# Altium PCB Copy of onboardpcb.PcbDoc
Units mil, origin at the board's own origin, x right, y up, seen from the top; angles counter-clockwise.
Board outline 6000 x 4000 mil, 2 copper layers (Top Layer, Bottom Layer); 11 components, 6 nets, 22 pads, 6 vias.
Unrouted connection lines stored in the file: 1.
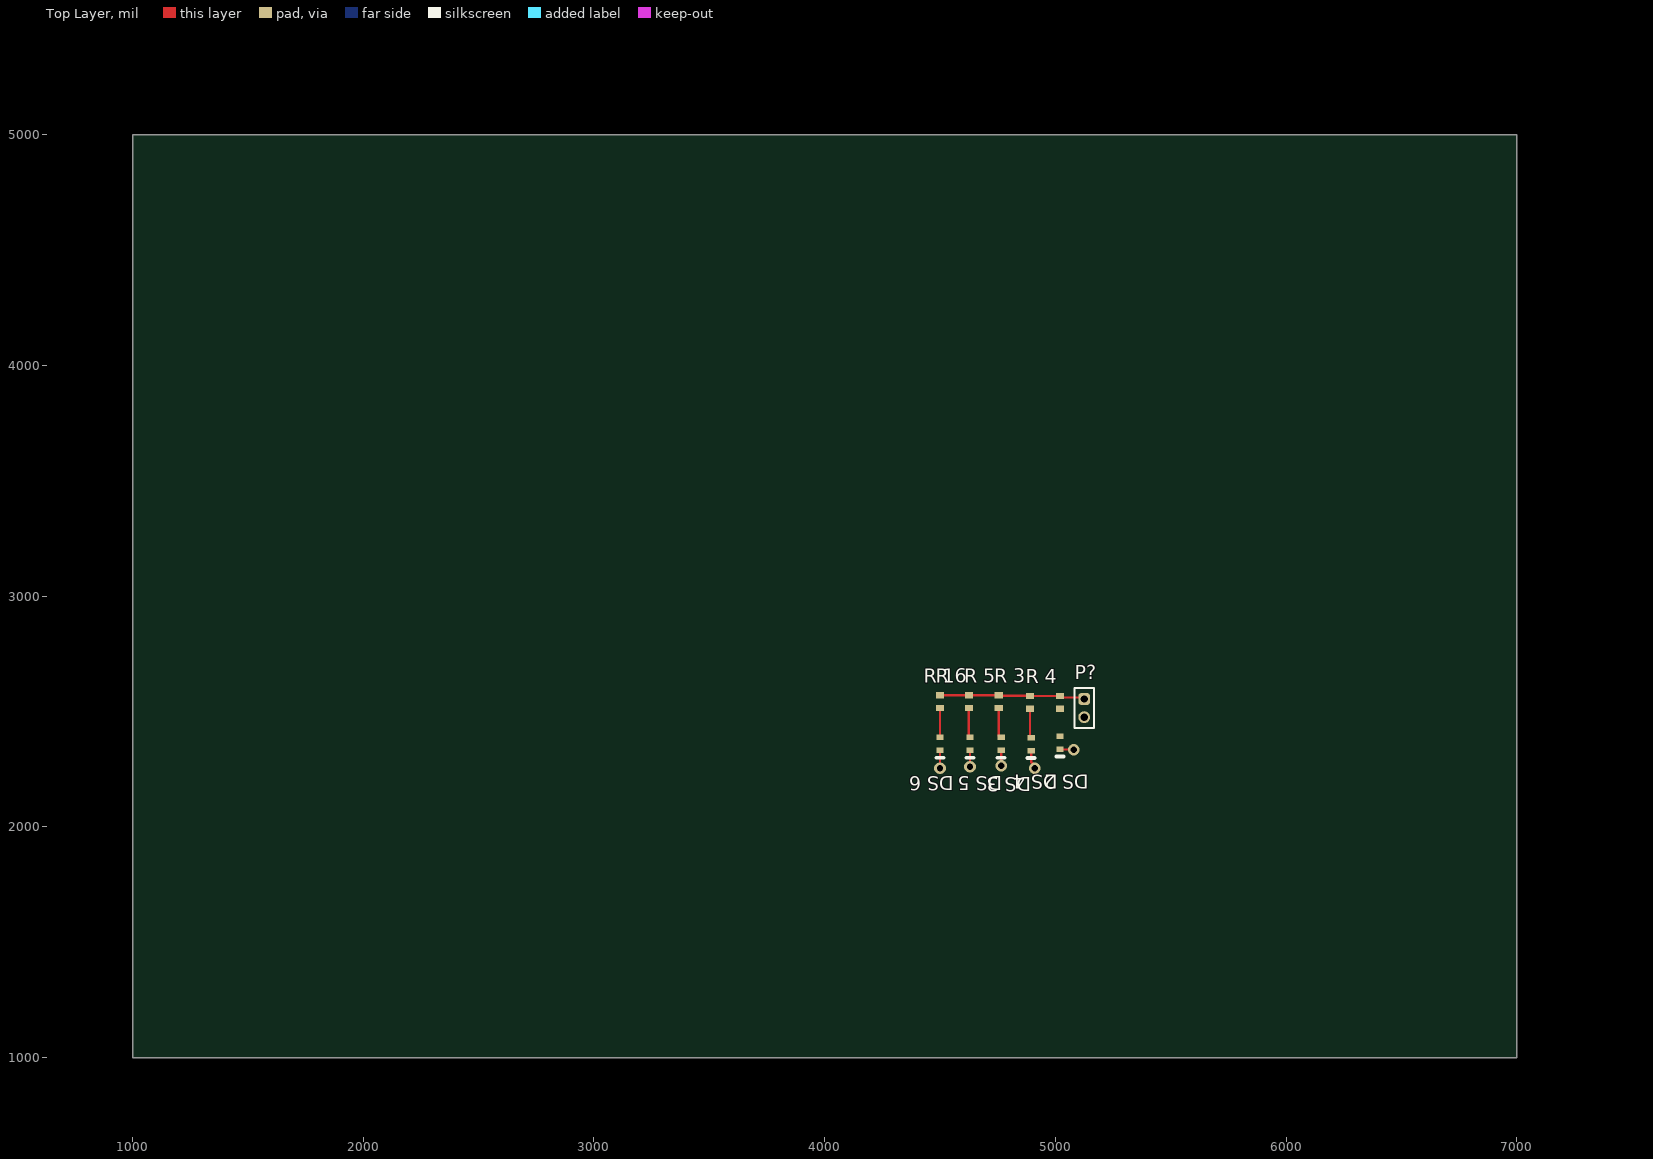
[diagram p0: Top Layer view]
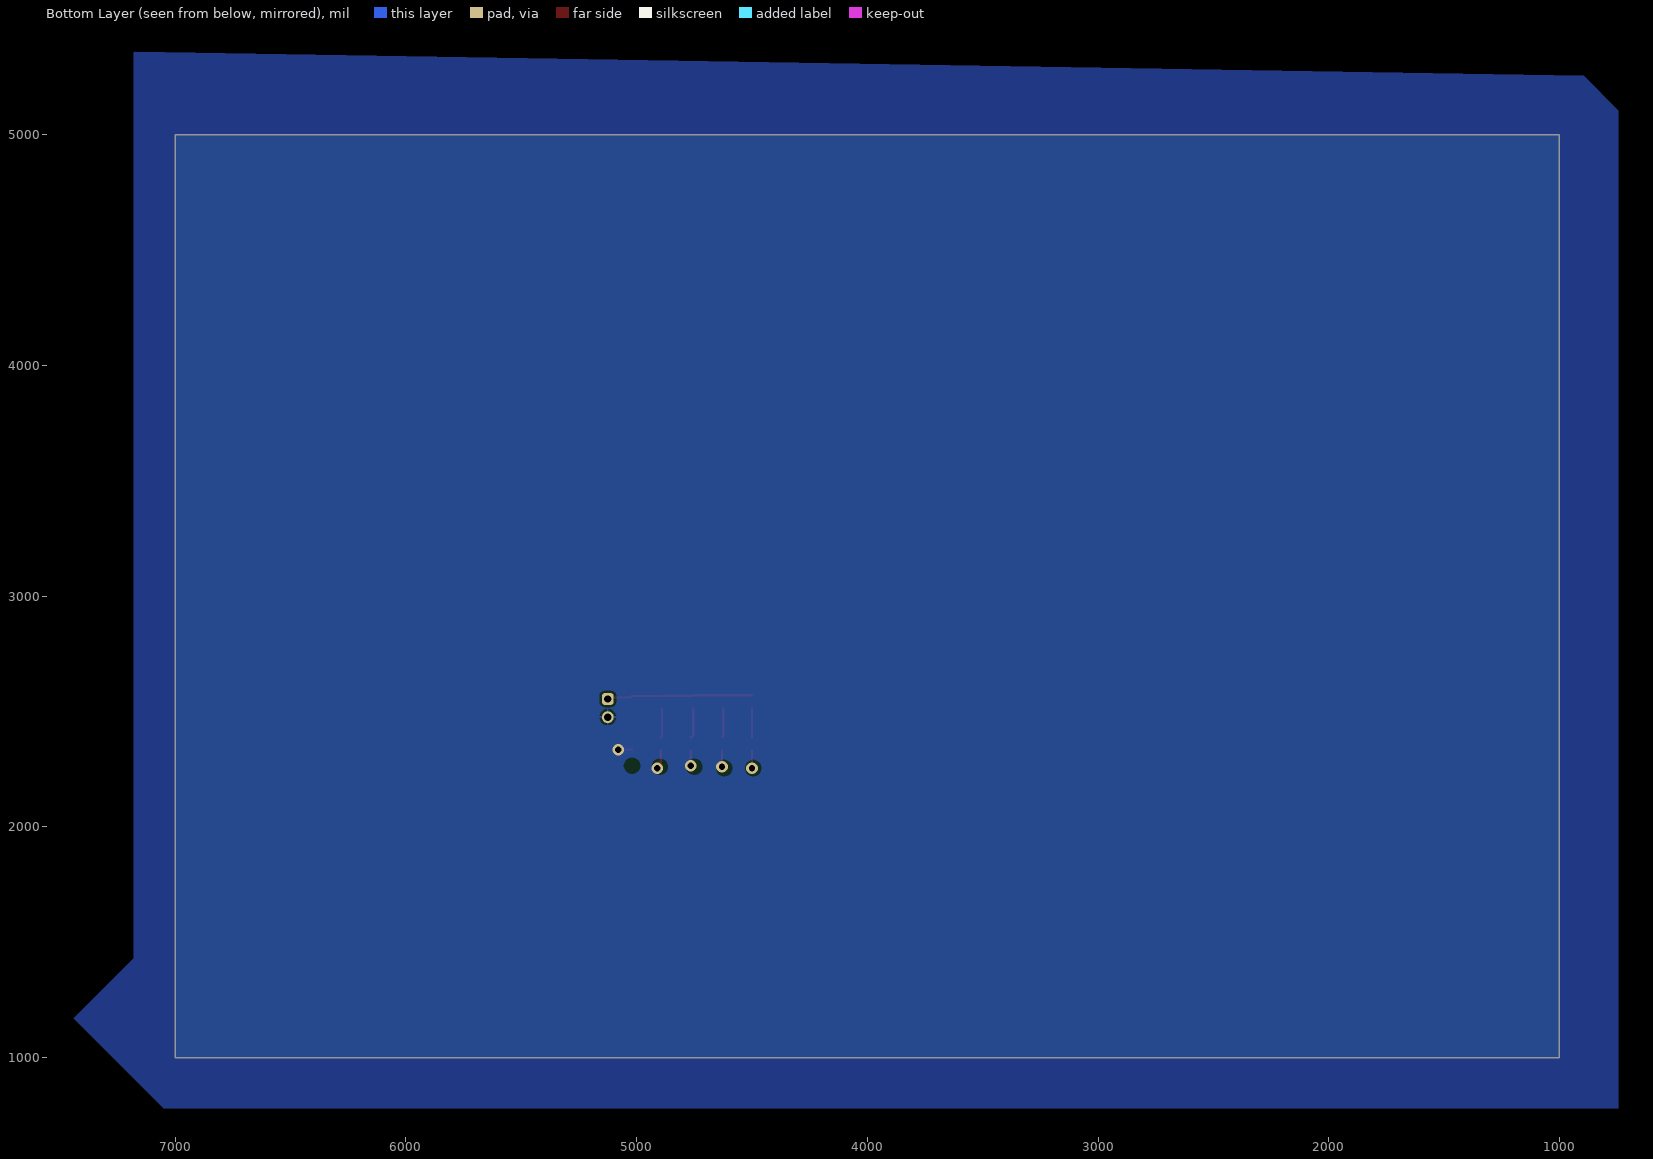
[diagram p1: Bottom Layer view, seen from below]

## Layer stack, top to bottom
Top Solder: solder mask 0.4, Solder Resist, Dk 3.5
Top Layer: signal copper 1.4
Dielectric 1: dielectric 12.6, FR-4, Dk 4.8
Bottom Layer: signal copper 1.4
Bottom Solder: solder mask 0.4, Solder Resist, Dk 3.5

## Board outline
1000,1000 7000,1000 7000,5000 1000,5000

## Design rules (kind name [scope] priority, off if disabled: settings)
Clearance [All] p1: gap=10 ignorepadtopadclearanceinfootprint=FALSE except(0: Arc-Hole Track-Hole SMDPad-Hole THPad-Hole Via-Hole Fill-Hole Poly-Hole Region-Hole Text-Hole)
PolygonConnect [All] p1: connectstyle=Relief reliefconductorwidth=10 reliefentries=4 polygonreliefangle="90 Angle" airgapwidth=10
RoutingVias [All] p1: holewidth=28 width=50 viastyle="Through Hole" minholewidth=28 minwidth=50 maxholewidth=28 maxwidth=50
SolderMaskExpansion [All] p1: expansion=4 istentingtop=FALSE
Width [All] p1: maxlimit=10 minlimit=10 preferedwidth=10
30 further rules are at their usual default settings.

## Components (designator, comment, footprint, x,y, rotation, side; value= is the part's Value field where it differs from the comment)
"DS 2" "TLMS1100-GS08" VISH-TLMX1100_V 5020,2365 r270 top
"DS 3" "TLMS1100-GS08" VISH-TLMX1100_V 4895,2358.54 r270 top
"DS 4" "TLMS1100-GS08" VISH-TLMX1100_V 4765,2360 r270 top
"DS 5" "TLMS1100-GS08" VISH-TLMX1100_V 4630,2360 r270 top
"DS 6" "TLMS1100-GS08" VISH-TLMX1100_V 4500,2360 r270 top
P? "62000211121" 62000211121 5125,2515 r270 top
"R 1" "RC0603FR-07330RL" RESC1608X55X25NL10T15 5020,2540 r270 top
"R 3" "RC0603FR-07330RL" RESC1608X55X25NL10T15 4755,2542.56 r270 top
"R 4" "RC0603FR-07330RL" RESC1608X55X25NL10T15 4890,2540 r270 top
"R 5" "RC0603FR-07330RL" RESC1608X55X25NL10T15 4625,2542.56 r270 top
"R 6" "RC0603FR-07330RL" RESC1608X55X25NL10T15 4500,2542.56 r270 top

## Footprints (in the part's own frame and the unit in brackets; to place one, negate y for a bottom-side part, rotate by r counter-clockwise, add the part's x,y. Pads: shape width x height; smd on the part's side, far side on the other; paste and mask are expansions set on the pad)
62000211121 [mm] "Pin Header, pitch 2.00 mm, THT, Vertical, single row, 2p"
  rrect50% 1.3x1.3 hole 0.8: 1(-1,0)
  round 1.3 hole 0.8: 2(1,0)
  silkscreen extent -2.2,-1.07 2.2,1.07, body extent -2,-1 2,1, height 6.05
RESC1608X55X25NL10T15 [mm] "Chip Resistor, 2-Leads, Body 1.70x0.90mm, IPC Medium Density"
  rect 0.7x0.9 smd: 1(-0.7,0) 2(0.7,0)
  body extent -0.85,-0.45 0.85,0.45, height 0.55
VISH-TLMX1100_V [mm] "SMD, 2-Leads, Body 1.6x0.8mm"
  rect 0.6x0.8 smd: 1(-0.725,0) 2(0.725,0)
  silkscreen extent 1.53,-0.4 1.53,0.4, body extent -0.8,-0.4 0.8,0.4, height 0.65

## Part data
"DS 2" "DS 3" "DS 4" "DS 5" "DS 6": library part CMP-1666-00027-1, "LED, RED, 2.1 V, -40 to 100 degC, 2-Pin SMD (0603), RoHS, Tape and Reel", Capacitance="12 pF", Case Code (Imperial)=0603, Case Code (Metric)=1608, Max Operating Temperature=125degC, Min Operating Temperature=-55degC, Package Quantity=4000, Resistance="100000000000 Ohm", Tolerance=5%, Type (Capacitors)=C0G, Voltage Rating="50 V", Case/Package=0603, ComponentLink1Description="Manufacturer URL", ComponentLink1URL=http://www.vishay.com/, ComponentLink2Description=Datasheet, ComponentLink2URL=http://www.vishay.com/docs/83173/tlmb1100.pdf, DatasheetVersion="Rev. 2.7, 03/2016", Height="0.8 mm", Length="1.6 mm", Mount="Surface Mount", PackageDescription="2-Pin Surface Mount Device, Body 1.6 x 0.8 mm", PackageReference=TLMX1100, Packaging="Tape and Reel", Pins=2, Radiation Hardening=No, REACH SVHC="No SVHC", RoHSCompliant=True, Voltage Rating (DC)="50 V", Width="0.8 mm"
P?: library part CMP-1502-00956-3, Contact Resistance=20mΩ, Current Rating=2A, Max Operating Temperature=105°C, Min Operating Temperature=-40°C, Operating Supply Voltage=200V, Contact Material=Gold, Gender=Male, Height=6.35mm, Lead Pitch=2mm, NexarPartId=61924778, Number of Contacts=2, Number of Pins=2, Number of Rows=1, Orientation=Vertical, RoHS=Non-Compliant, Voltage Rating=200V
"R 1" "R 3" "R 4" "R 5" "R 6": library part CMP-1659-00020-2, "Chip Resistor, 330 Ohm, +/- 1%, 0.1 W, -55 to 155 degC, 0603 (1608 Metric), RoHS, Tape and Reel", Capacitance="47 uF", Case Code (Imperial)=2917, Case Code (Metric)=7343, Max Operating Temperature=125degC, Min Operating Temperature=-55degC, Package Quantity=500, Tolerance=10%, Voltage Rating="16 V", Case/Package=2917, ComponentLink1Description="Manufacturer URL", ComponentLink1URL=http://www.yageo.com/, ComponentLink2Description=Datasheet, ComponentLink2URL=http://www.yageo.com/documents/recent/PYu-RC_Group_51_RoHS_L_04.pdf, DatasheetVersion="Rev. 4, 02/2016", ESR="800 mohm", Height="3.1 mm", Length="7.3 mm", Mount="Surface Mount", PackageDescription="2-Pin Surface Mount Device, Body 1.6 x 0.8 mm", PackageReference=0603, Packaging="Tape and Reel", Pins=2, Radiation Hardening=No, REACH SVHC="No SVHC", RoHSCompliant=True, Voltage Rating (DC)="16 V", Width="4.3 mm"

## Via types
v1: diameter 50, hole 28, Top Layer to Bottom Layer, 6 vias

## Nets (pads, with @x,y where several pads share a name; then routed paths per layer and width w, separated by ;. In a path a pad name is that pad's centre, name@x,y a point inside that pad or via, vN(x,y) a via of type N, cw(c..) or ccw(c..) an arc to the next point about the centre after c; other vN are vias at no path point)
GND: "DS 2.2" "DS 3.2" "DS 4.2" "DS 5.2" "DS 6.2" P?.2 | length 356.2
  Top Layer w10: v1(4500,2255) 4500,2331.46 ; v1(4630,2260) 4630,2331.46 ; v1(4765,2265) 4765,2331.46 ; 4895,2330 4895,2280.82 4910,2265.82 v1(4910,2255) ; 5020,2336.46 5020.73,2335.73 5079.27,2335.73 v1(5080,2335)
  other v1: 5125,2475.63
"NetDS 3_1": "DS 3.1" "R 4.2" | length 127.4
  Top Layer w10: 4890,2512.44 4890,2392.09 4895,2387.09
"NetDS 4_1": "DS 4.1" "R 3.2" | length 132.5
  Top Layer w10: 4755,2515 4755,2395.35 4761.81,2388.54 4765,2388.54
"NetDS 5_1": "DS 5.1" "R 5.2" | length 128.5
  Top Layer w10: 4625,2515 4625,2393.54 4630,2388.54
"NetDS 6_1": "DS 6.1" "R 6.2" | length 126.5
  Top Layer w10: 4500,2388.54 4500,2515
NetP?_1: "R 1.1" "R 3.1" "R 4.1" "R 5.1" "R 6.1" P?.1 | length 631.5
  Top Layer w10: 4500,2570.12 4625,2570.12 4755,2570.12 4756.28,2568.84 4888.72,2568.84 4890,2567.56 5020,2567.56 5026.59,2560.96 5118.41,2560.96 P?.1
pads on no net: "DS 2.1" "R 1.2"

## Polygon pours and split planes (outlines as drawn)
GND on Bottom Layer "GND_L02_P000" (solid, pour order 0): 895,5255 745,5105 745,780 7050,780 7440,1170 7180,1430 7180,5360